# Altium PCB Capacitor Isolated Supply (Bipolar).PcbDoc
Units mil, origin at the board's own origin, x right, y up, seen from the top; angles counter-clockwise.
Board outline 3149.61 x 1929.13 mil, 2 copper layers (Top Layer, Bottom Layer); 28 components, 19 nets, 78 pads, 0 vias.
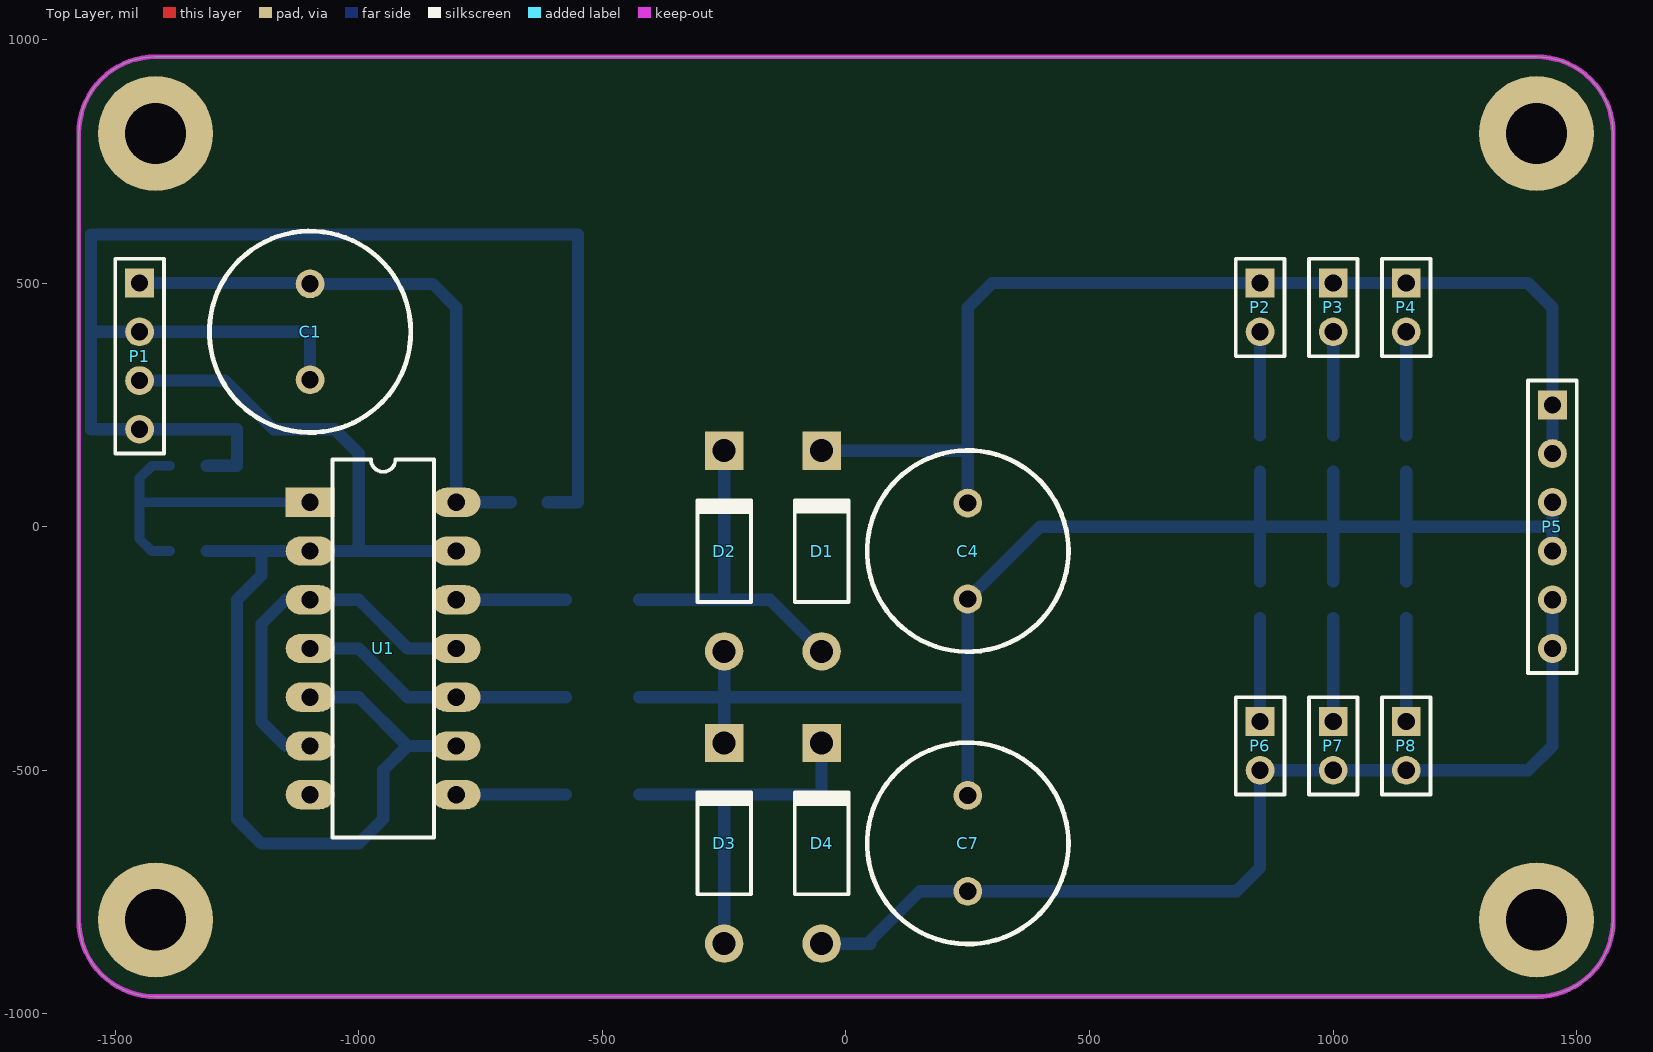
[diagram p0: Top Layer view]
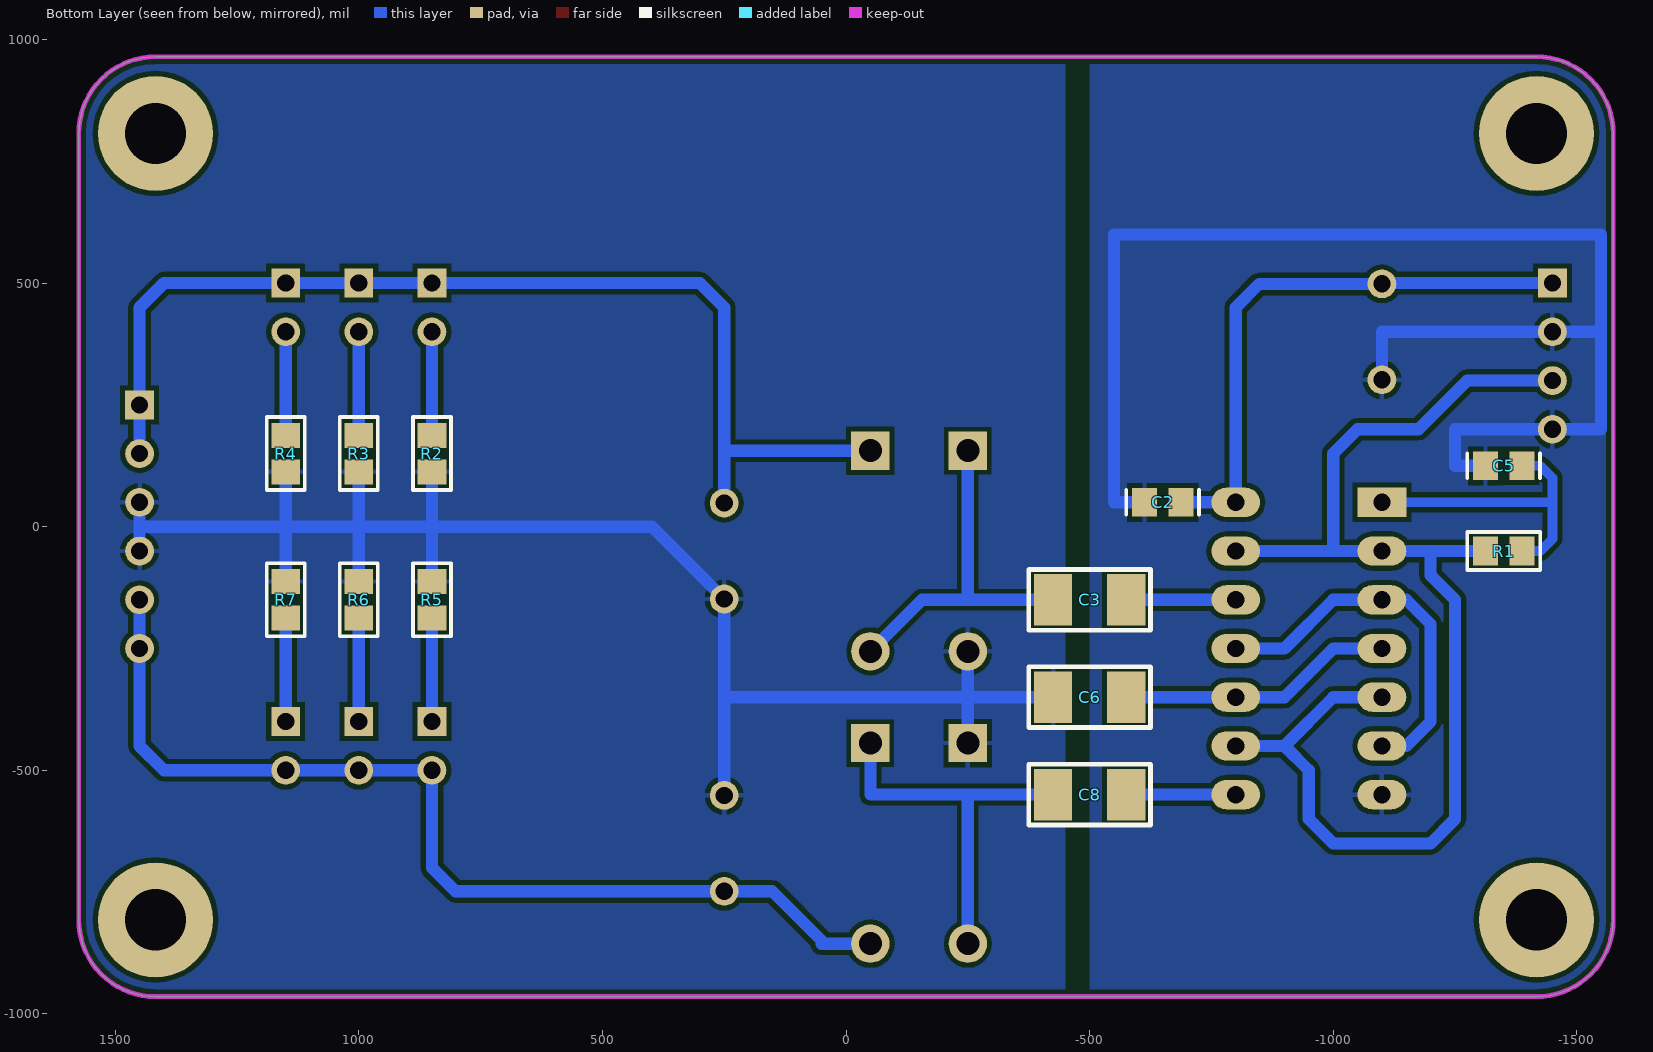
[diagram p1: Bottom Layer view, seen from below]

## Layer stack, top to bottom
Top Layer: signal copper 1.4
Dielectric: dielectric 12.6, FR-4, Dk 4.8
Bottom Layer: signal copper 1.4

## Board outline
-1574.8,-807.09 -1574.8,807.09 cw(c-1417.32,807.09) -1417.32,964.57 1417.32,964.57 cw(c1417.32,807.09) 1574.8,807.09 1574.8,-807.09 cw(c1417.32,-807.09) 1417.32,-964.57 -1417.32,-964.57 cw(c-1417.32,-807.09)

## Design rules (kind name [scope] priority, off if disabled: settings)
Clearance [All] p1: gap=10
PolygonConnect [All] p1: connectstyle=Relief reliefconductorwidth=10 reliefentries=4 polygonreliefangle="90 Angle" airgapwidth=10
RoutingVias [All] p1: holewidth=31.5 width=59.06 viastyle="Through Hole" minholewidth=31.5 minwidth=59.06 maxholewidth=59.06 maxwidth=98.43
SilkToSolderMaskClearance SilkscreenOverComponentPads [IsPad] p1: minsilkscreentomaskgap=10 clearancetoexposedcopper=TRUE
SolderMaskExpansion [All] p1: expansion=4
Width [All] p1: maxlimit=100 minlimit=10 preferedwidth=20
27 further rules are at their usual default settings.

## Components (designator, comment, footprint, x,y, rotation, side; value= is the part's Value field where it differs from the comment)
C1 "100uF" RB5-10.5 -1100,400 r270 top
C2 "100nF" "CAP (3D) - 0805" -650,50 r0 bottom
C3 "1uF" "RES (3D) - 1210" -500,-150 r0 bottom
C4 "100uF" RB5-10.5 250,-50 r270 top
C5 "Cap" "CAP (3D) - 0805" -1350,125 r0 bottom
C6 "1uF" "RES (3D) - 1210" -500,-350 r0 bottom
C7 "100uF" RB5-10.5 250,-650 r270 top
C8 "1uF" "RES (3D) - 1210" -500,-550 r0 bottom
D1 "1N5817" DO-41 -50,-50 r90 top
D2 "1N5817" DO-41 -250,-50 r90 top
D3 "1N5817" DO-41 -250,-650 r90 top
D4 "1N5817" DO-41 -50,-650 r90 top
P1 "Header 4" HDR1X4 -1450,500 r270 top
P2 "Header 2" HDR1X2 850,500 r270 top
P3 "Header 2" HDR1X2 1000,500 r270 top
P4 "Header 2" HDR1X2 1150,500 r270 top
P5 "Header 6" HDR1X6 1450,250 r270 top
P6 "Header 2" HDR1X2 850,-400 r270 top
P7 "Header 2" HDR1X2 1000,-400 r270 top
P8 "Header 2" HDR1X2 1150,-400 r270 top
R1 "22k" "RES (3D) - 0805" -1350,-50 r180 bottom
R2 "10k" "RES (3D) - 0805" 850,150 r90 bottom
R3 "1k" "RES (3D) - 0805" 1000,150 r90 bottom
R4 "100R" "RES (3D) - 0805" 1150,150 r90 bottom
R5 "10k" "RES (3D) - 0805" 850,-150 r90 bottom
R6 "1k" "RES (3D) - 0805" 1000,-150 r90 bottom
R7 "100R" "RES (3D) - 0805" 1150,-150 r90 bottom
U1 "SN7404N" N014 -950,-250 r270 top

## Footprints (in the part's own frame and the unit in brackets; to place one, negate y for a bottom-side part, rotate by r counter-clockwise, add the part's x,y. Pads: shape width x height; smd on the part's side, far side on the other; paste and mask are expansions set on the pad)
"CAP (3D) - 0805" [mm]
  rect 1.3x1.5 smd: 1(-0.95,0) 2(0.95,0)
  silkscreen extent -1.9,-0.65 1.9,0.65, body extent -1,-0.63 1,0.63, height 1
DO-41 [mm] "Diode, Axial; Body 5.2 x 2.7 mm (LxDia. max), Lead Dia. 0.86 mm (max)"
  round 2 hole 1.2: 1(-5.23,0)
  rect 2x2 hole 1.2: 2(5.23,0)
  silkscreen extent -2.65,-1.41 2.75,1.4
HDR1X2 [mm] "Connector; Header; 2 Position"
  rect 1.5x1.5 hole 0.9: 1(0,0)
  round 1.5 hole 0.9: 2(2.54,0)
  silkscreen extent -1.27,-1.27 3.81,1.27
HDR1X4 [mm] "Connector; Header; 4 Position"
  rect 1.5x1.5 hole 0.9: 1(0,0)
  round 1.5 hole 0.9: 2(2.54,0) 3(5.08,0) 4(7.62,0)
  silkscreen extent -1.27,-1.27 8.89,1.27
HDR1X6 [mm] "Connector; Header; 6 Position"
  rect 1.5x1.5 hole 0.9: 1(0,0)
  round 1.5 hole 0.9: 2(2.54,0) 3(5.08,0) 4(7.62,0) 5(10.16,0) 6(12.7,0)
  silkscreen extent -1.27,-1.27 13.97,1.27
N014 [mil] "DIP; 14 Leads; Row Spacing 7.62 mm; Pitch 2.54 mm"
  rect 60x100 hole 35.43: 1(-300,-150)
  oval 60x100 hole 35.43: 2(-200,-150) 3(-100,-150) 4(0,-150) 5(100,-150) 6(200,-150) 7(300,-150) 8(300,150) 9(200,150) 10(100,150) 11(0,150) 12(-100,150) 13(-200,150) 14(-300,150)
  silkscreen extent -388,-104 388,104
RB5-10.5 [mm] "Capacitor (Radial); 2 Leads"
  round 1.5 hole 0.9: 1(-2.5,0) 2(2.5,0)
  silkscreen extent -5.25,-5.25 5.25,5.25
"RES (3D) - 0805" [mm]
  rect 1.3x1.5 smd: 1(-0.95,0) 2(0.95,0)
  silkscreen extent -1.91,-0.99 1.91,0.99, body extent -1,-0.63 1,0.63, height 1
"RES (3D) - 1210" [mm] "Chip Diode; Body 3.2 x 2.5 mm (LxW typ)"
  rect 2x2.7 smd: 1(-1.905,0) 2(1.905,0)
  silkscreen extent -3.17,-1.59 3.17,1.59, body extent -2,-1.24 2,1.24, height 1.7

## Part data
C1 C4 C7: library part "Cap Pol", "CAPACITOR POLARISED TAG B CASE"
C2 C3 C6 C8: library part CAP, "CAPACITOR SMD 0603"
C5: "Capacitor"
D1 D2 D3 D4: library part "D Schottky", "Schottky Diode"
P1: "Header, 4-Pin"
P2 P3 P4 P6 P7 P8: "Header, 2-Pin"
P5: "Header, 6-Pin"
R1 R2 R3 R4 R5 R6 R7: library part "RES SMD 0603 10k", "RESISTOR SMD 0603 10k"
U1: "Hex Inverter"

## Free pads (board coordinates)
  round 236.22 hole 125.98: 0(-1417.32,-807.09) 0(-1417.32,807.09) 0(1417.32,-807.09) 0(1417.32,807.09)

## Nets (pads, with @x,y where several pads share a name; then routed paths per layer and width w, separated by ;. In a path a pad name is that pad's centre, name@x,y a point inside that pad or via, vN(x,y) a via of type N, cw(c..) or ccw(c..) an arc to the next point about the centre after c; other vN are vias at no path point)
COM: C4.2 C6.2 C7.1 D2.1 D3.2 P5.3 P5.4 R2.1 R3.1 R4.1 R5.2 R6.2 R7.2 | length 3303.4
  Bottom Layer w25: C6.2 -250.01,-350.01 ; D3.2 -250,-350.01 ; D2.1 -250,-350 ; C7.1 250,-350 ; R5.2 850,0 ; R2.1 850,0 ; R6.2 1000,0 ; R3.1 1000,0 ; R7.2 1150,0 ; R4.1 1150,0 ; P5.4 1450,0 ; P5.3 1450,0 ; -250.01,-350.01 249.99,-350.01 ; 250,-350 C4.2 398.43,0 850,0 ; 850,0 1000,0 ; 1000,0 1150,0 ; 1150,0 1450,0
DRIVE: P1.3 R1.1 U1.2 U1.5 U1.9 U1.13 | length 2649
  Bottom Layer w25: P1.3 -1275,300 -1175,200 -1050,200 -1000,150 -1000,-50 ; R1.1 -1200,-50 ; U1.5 -1000,-350 -900,-450 ; U1.9 -900,-450 ; U1.13 -1000,-50 ; -1200,-50 -1200,-100 -1250,-150 -1250,-600 -1200,-650 -1000,-650 -950,-600 -950,-500 -900,-450 ; -1200,-50 U1.2 -1000,-50
GND: C1.2 C2.2 C5.2 P1.2 P1.4 U1.7 | length 2998.6
  Bottom Layer w25: C5.2 -1250,125 -1250,200 P1.4 -1550,200 -1550,400 ; C1.2 -1100,400 P1.2 -1550,400 ; C2.2 -550,50 -550,600 -1550,600 -1550,400
NetC3_2: C3.2 D1.1 D2.2 | length 724.8
  Bottom Layer w25: C3.2 -250.01,-150.01 ; D2.2 -250,-150 ; D1.1 -155.9,-150.01 -250.01,-150.01
NetC5_1: C5.1 R1.2 U1.1 | length 620.9
  Bottom Layer w20: R1.2 -1425,-50 -1450,-25 -1450,50 ; C5.1 -1425,125 -1450,100 -1450,50 ; U1.1 -1450,50
NetC8_2: C8.2 D3.1 D4.2 | length 786.8
  Bottom Layer w25: C8.2 -250,-550.01 ; D3.1 -250,-550.01 ; D4.2 -50,-550 -250,-550.01
NetP2_2: P2.2 R2.2 | length 212.6
  Bottom Layer w25: R2.2 P2.2
NetP3_2: P3.2 R3.2 | length 212.6
  Bottom Layer w25: R3.2 P3.2
NetP4_2: P4.2 R4.2 | length 212.6
  Bottom Layer w25: R4.2 P4.2
NetP6_1: P6.1 R5.1 | length 212.6
  Bottom Layer w25: P6.1 R5.1
NetP7_1: P7.1 R6.1 | length 212.6
  Bottom Layer w25: P7.1 R6.1
NetP8_1: P8.1 R7.1 | length 212.6
  Bottom Layer w25: P8.1 R7.1
NetU1_3: U1.3 U1.6 U1.11 | length 732.8
  Bottom Layer w25: U1.6@-1150,-450 -1200,-400 -1200,-200 -1150,-150 U1.3 -1000,-150 -900,-250 U1.11
Q1: C3.1 U1.12 | length 225
  Bottom Layer w25: U1.12 C3.1
Q2: C8.1 U1.8 | length 225
  Bottom Layer w25: U1.8 C8.1
Q\: C6.1 U1.4 U1.10 | length 566.4
  Bottom Layer w25: U1.4 -1000,-250 -900,-350 U1.10 C6.1
V+: C4.1 D1.2 P2.1 P3.1 P4.1 P5.1 P5.2 | length 2245.4
  Bottom Layer w25: D1.2 244.09,155.91 250,150 ; C4.1 250,150 ; P5.2 P5.1 1450,450 1400,500 P4.1 P3.1 P2.1 300,500 250,450 250,150
V-: C7.2 D4.1 P5.5 P5.6 P6.2 P7.2 P8.2 | length 2088.7
  Bottom Layer w25: D4.1 50,-855.91 50,-850 151.57,-748.43 C7.2 801.57,-748.43 850,-700 P6.2 P7.2 P8.2 1400,-500 1450,-450 P5.6 P5.5
VCC: C1.1 C2.1 P1.1 U1.14 | length 1183.3
  Bottom Layer w25: P1.1 -1101.57,500 C1.1 -848.43,498.43 -800,450 U1.14 C2.1

## Polygon pours and split planes (outlines as drawn)
COM on Bottom Layer "Bottom Layer-No Net" (solid, remove dead copper, pour order 6): -450,1000 -450,-1000 1600,-1000 1600,1000 -450,1000
GND on Bottom Layer "Bottom Layer-No Net" (solid, remove dead copper, pour order 4): -500,50 -500,1000 -1600,1000 -1600,-1000 -500,-1000 -500,50

## Keep-outs
Keep-Out Layer:
  the board outline again, w10

## Silkscreen, mask and mechanical layers (free items; w line width, h text height)
Mechanical 1:
  the board outline again, w10